# EAGLE board core-controller (EAGLE 6.6.0)
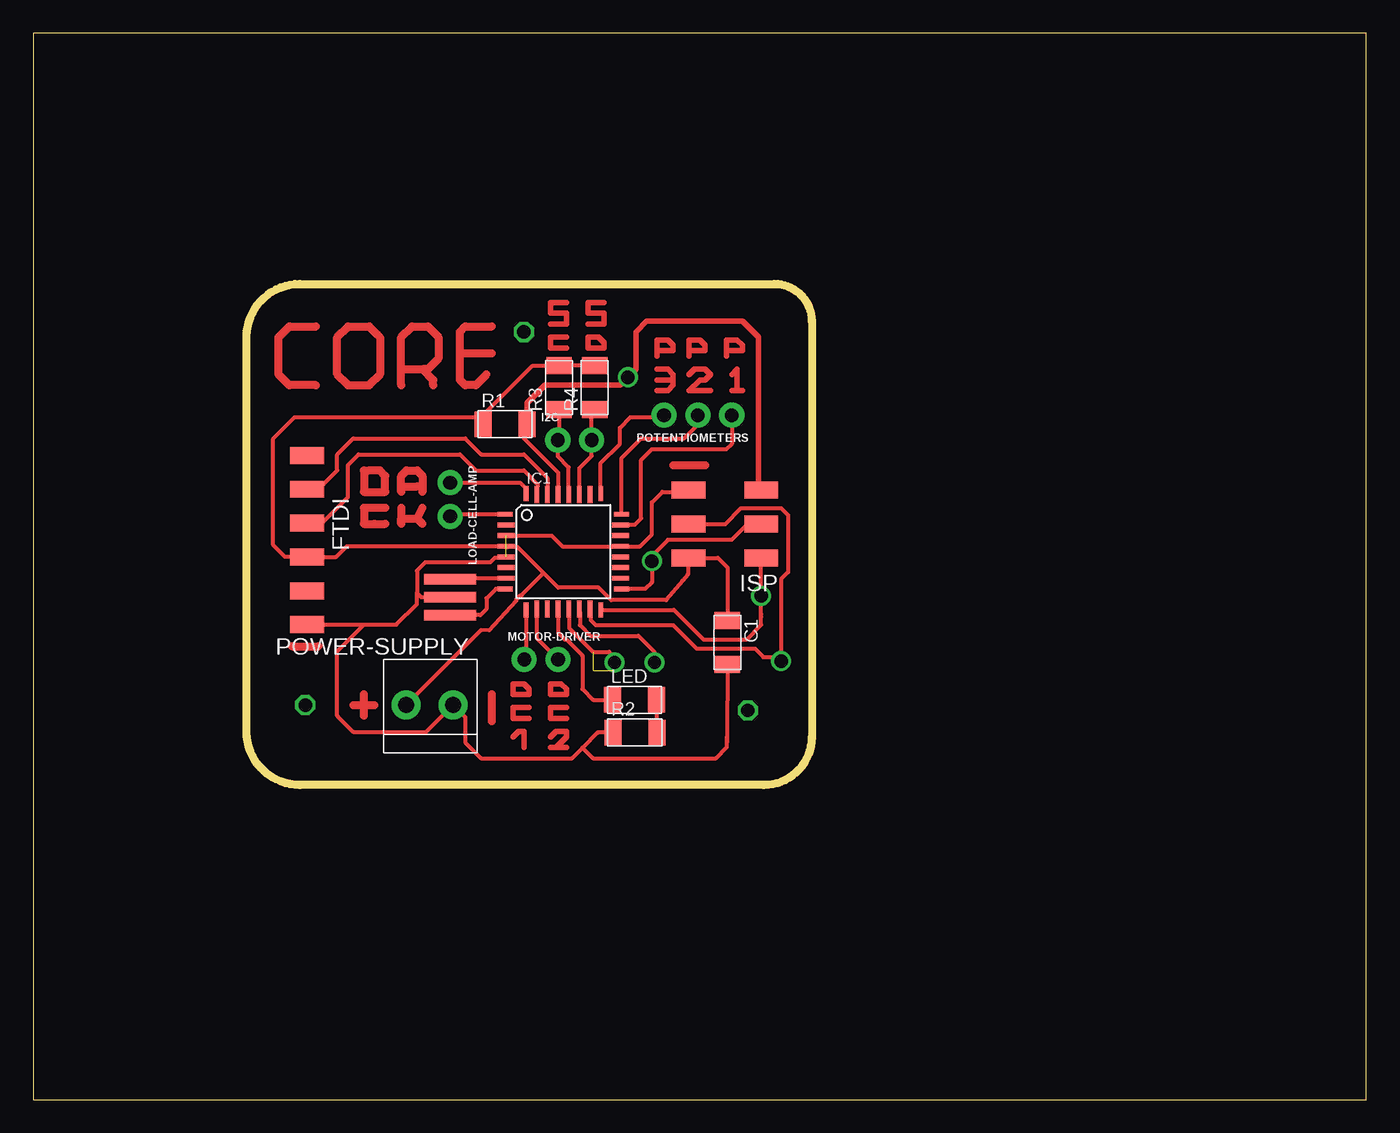
[diagram p0: board, top side]

Size 100 x 80 mm. Coordinates in mm from the lower left corner, seen from the top.
Outline: 0,0 100,0 100,80 0,80 0,0
Copper layers (1*16): Top 0.035mm / dielectric 1.5mm / Bottom 0.035mm
Design rules "default *": minimum track width 6mil, minimum drill 0.35mm, track to track 15.625mil, track to pad 15.625mil, pad to pad 15.625mil, via to via 15.625mil, smd to smd 15.625mil, copper to edge 40mil, drill to drill 6mil, minimum pad ring 10mil, minimum via ring 8mil, stop-mask expansion 4mil, vias tented up to drill 0mil, thermal gap 10mil
Milling: area 16,23.6 to 58.4,61.2

## Footprints (pad centres in the part's own frame; a part is rotated, then mirrored left to right if it is on the bottom)
C1206FAB = smd 1.27 x 1.905: 1 -1.651,0; 2 1.651,0
1X06SMD = smd 2.54 x 1.27: 1 0,6.35; 2 0,3.81; 3 0,1.27; 4 0,-1.27; 5 0,-3.81; 6 0,-6.35
1X02_NO_SILK = drill 1.016 pad 1.88: 1 0,0; 2 2.54,0
TQFP32-08THIN = smd 1.118 x 0.356: 1 -4.369,2.8; 8 -4.369,-2.8; 17 4.369,-2.8; 24 4.369,2.8 | smd 1.27 x 0.356: 2 -4.293,2; 3 -4.293,1.2; 4 -4.293,0.4; 5 -4.293,-0.4; 6 -4.293,-1.2; 7 -4.293,-2; 18 4.293,-2; 19 4.293,-1.2; 20 4.293,-0.4; 21 4.293,0.4; 22 4.293,1.2; 23 4.293,2 | smd 0.356 x 1.118: 9 -2.8,-4.369; 16 2.8,-4.369; 25 2.8,4.369; 32 -2.8,4.369 | smd 0.356 x 1.27: 10 -2,-4.293; 14 1.2,-4.293; 15 2,-4.293; 26 2,4.293; 27 1.2,4.293; 31 -2,4.293 | smd 0.35 x 1.27: 11 -1.2,-4.293; 12 -0.4,-4.293; 13 0.4,-4.293; 28 0.4,4.293; 29 -0.4,4.293; 30 -1.2,4.293
2X03SMD = smd 2.54 x 1.27: 1 -2.54,2.54; 2 2.92,2.54; 3 -2.54,0; 4 2.92,0; 5 -2.54,-2.54; 6 2.92,-2.54
LED1206FAB = smd 1.27 x 1.905: 1 -1.651,0; 2 1.651,0
1X03_NO_SILK = drill 1.016 pad 1.88: 1 0,0; 2 2.54,0; 3 5.08,0
ED555DS-2DS = drill 1.2 pad 2.184: 1 1.8,0; 2 -1.7,0
R1206FAB = smd 1.27 x 1.905: 1 -1.651,0; 2 1.651,0
EFOBM = smd 0.8 x 3.9: 1 -1.35,0; 2 0,0; 3 1.35,0

## Placement (x,y rotation side)
C1  1uf  [C1206FAB]  52.07,34.29 270 top
FTDI  FTDI  [1X06SMD]  20.53,41.98 180 top
I2C  [1X02_NO_SILK]  39.35,49.48 0 top
IC1  ATMEGA88-THIN  [TQFP32-08THIN]  39.77,41.11 0 top
ISP  [2X03SMD]  52.07,43.18 180 top
LED  Blue  [LED1206FAB]  45.11,29.99 0 top
LOAD-CELL-AMP  [1X02_NO_SILK]  31.27,46.29 270 top
MOTOR-DRIVER  [1X02_NO_SILK]  36.83,33.02 0 top
POTENTIOMETERS  [1X03_NO_SILK]  52.4,51.34 180 top
POWER-SUPPLY  TERM-1X02-FABLAB  [ED555DS-2DS]  29.68,29.61 0 top
R1  10kohm  [R1206FAB]  35.39,50.67 0 top
R2  499ohm  [R1206FAB]  45.13,27.54 0 top
R3  10kohm  [R1206FAB]  39.44,53.41 90 top
R4  10kohm  [R1206FAB]  42.12,53.41 90 top
XTAL  20 Mhz  [EFOBM]  31.28,37.7 270 top

## Library data of the parts
C1 FTDI IC1 ISP LED POWER-SUPPLY R1-R4 XTAL = fab
I2C LOAD-CELL-AMP MOTOR-DRIVER POTENTIOMETERS = SparkFun-Connectors

## Nets
5V: C1.1 FTDI.3 IC1.4 ISP.2 POWER-SUPPLY.2 R1.1 R3.2 R4.2
AVCC: IC1.18
CLK: IC1.1 LOAD-CELL-AMP.2
DAT: IC1.32 LOAD-CELL-AMP.1
DC-IN-1: IC1.9 MOTOR-DRIVER.1
DC-IN-2: IC1.10 MOTOR-DRIVER.2
GND: C1.2 FTDI.1 IC1.3 IC1.5 IC1.21 ISP.6 POWER-SUPPLY.1 R2.1 XTAL.2
LED: IC1.12 LED.1
MISO: IC1.16 ISP.1
MOSI: IC1.15 ISP.4
N$1: IC1.7 XTAL.1
N$2: IC1.8 XTAL.3
N$5: LED.2 R2.2
PTM-1: IC1.23 POTENTIOMETERS.1
PTM-2: IC1.24 POTENTIOMETERS.2
PTM-3: IC1.25 POTENTIOMETERS.3
RST: IC1.29 ISP.5 R1.2
RXD: FTDI.5 IC1.30
SCK: IC1.17 ISP.3
SCL: I2C.1 IC1.28 R3.1
SDA: I2C.2 IC1.27 R4.1
TXD: FTDI.4 IC1.31
VCC: IC1.6

## Tracks (layer width: path | path; a pad name or v marks a point on that pad's centre or on a via)
5V
  Top 0.305: C1.1 52.07,39.93 51.36,40.64 ISP.2 49.1,39.4 48.7,38.91 47.48,37.48 43.35,37.48 42.42,38.41 39.38,38.41 38.29,39.49 | R4.2 R3.2 37.46,55.06 33.74,51.34 33.74,51.2 | R1.1 33.74,51.2 | 33.74,51.2 19.6,51.2 18,49.6 18,41.6 18.89,40.71 FTDI.3 22.71,40.71 23.51,41.51 IC1.4 35.55,41.44 36.34,41.44 38.29,39.49 | POWER-SUPPLY.2 33.6,35.23 34.2,35.2 36.24,37.44 36.24,37.53 36.56,37.85 36.65,37.85 38.29,39.49
CLK
  Top 0.305: IC1.1 31.43,43.91 LOAD-CELL-AMP.2
DAT
  Top 0.305: LOAD-CELL-AMP.1 36.51,46.29 36.97,45.83 IC1.32
DC-IN-1
  Top 0.305: IC1.9 36.97,33.16 MOTOR-DRIVER.1
DC-IN-2
  Top 0.305: IC1.10 37.77,34.62 MOTOR-DRIVER.2
GND  (1 unrouted)
  Top 0.305: ISP.6 49.48,45.72 49.6,45.6 47.2,45.6 46.4,44.8 46.4,42.4 45.51,41.51 IC1.21 39.69,41.51 38.89,42.31 IC1.3 | C1.2 52.04,27.2 | 52.04,27.2 52.04,26.81 | IC1.5 35.41,40.64 34.61,40.64 34.28,40.3 29.4,40.3 28.78,39.68 28.78,38.02 | XTAL.2 29.1,37.7 28.78,38.02 | 28.78,38.02 28.78,37.18 27.23,35.63 24.8,35.63 | FTDI.1 24.8,35.63 | 24.8,35.63 22.8,33.63 22.8,28.8 24,27.6 29.47,27.6 POWER-SUPPLY.1 32.4,28.69 32.4,26.8 33.6,25.6 40.4,25.6 41.2,26.4 | 41.2,26.4 42,25.6 51.2,25.6 52.04,26.44 52.04,27.2 | R2.1 42.34,27.54 41.2,26.4
LED
  Top 0.305: IC1.12 39.37,35.03 39.89,34.51 39.99,34.51 41.2,33.3 41.2,30.8 42.01,29.99 LED.1
MISO
  Top 0.305: IC1.16 48.06,36.74 50.27,34.53 53.53,34.53 54.61,35.61 54.61,36.21 54.61,36.4 ISP.1
MOSI  (via drill 1 pad 1.3)
  Top 0.305: ISP.4 51.92,43.18 53.11,44.37 56.11,44.37 56.63,43.84 56.63,39.58 56.1,39.04 56.1,33.2 | 56.1,33.2 v56.1,32.9 | IC1.15 41.84,36.75 41.84,35.95 42.19,35.6 48,35.6 49.77,33.83 54.15,33.83 54.78,33.2 56.1,33.2
N$1
  Top 0.305: IC1.7 30.54,39.11 XTAL.1
N$2
  Top 0.305: IC1.8 34.71,38.31 34,37.6 34,36.8 33.55,36.35 XTAL.3
N$3
  Top 0.61: 19.4,34 21.4,34
N$4
  Top 0.61: 24,29.6 25.6,29.6
N$5
  Top 0.305: LED.2 46.76,27.56 R2.2
N$6
  Top 0.61: 24.8,28.8 24.8,30.4
N$7
  Top 0.61: 34.4,28.4 34.4,30.4
N$8
  Top 0.61: 24.8,47.2 24.8,45.6 26.4,45.6 26.4,46.8 26,47.2 25.6,47.2 25.2,47.2 24.8,47.2
N$9
  Top 0.61: 27.6,45.6 27.6,46 | 27.6,46 27.6,46.8 28,47.2 28.8,47.2 29.2,46.8 29.2,45.6 | 27.6,46 28.8,46
N$10
  Top 0.406: 36,31.2 36,30.4 37.2,30.4 37.2,30.8 36.8,31.2 36,31.2
N$11
  Top 0.61: 26.4,43.2 25.6,43.2 24.8,43.2 24.8,44.4 26.4,44.4
N$12
  Top 0.61: 27.6,44.4 27.6,43.6 | 27.6,43.2 27.6,43.6 | 27.6,43.6 28.8,43.6 | 29.2,43.2 28.8,43.6 | 28.8,43.6 29.2,44.4
N$13
  Top 0.406: 37.2,29.41 36,29.41 36,28.61 37.2,28.61
N$14
  Top 0.406: 38.8,31.2 39.6,31.2 40,30.8 40,30.4 38.8,30.4 38.8,31.2
N$15
  Top 0.406: 40,29.41 38.8,29.41 38.8,28.61 40,28.61
N$16
  Top 0.406: 36,27.22 36.4,27.62 36.8,27.62 36.8,26.42
N$17
  Top 0.406: 38.8,27.22 39.2,27.62 40,27.62 40,27.22 39.2,26.42 | 39.2,26.42 38.8,26.42 | 39.2,26.42 40,26.42
N$18
  Top 0.61: 48,47.6 50.4,47.6
N$19
  Top 0.406: 46.8,53.2 47.6,53.2 48,53.6 48,54 | 46.8,54 48,54 | 48,54 48,54.4 47.6,54.8 46.8,54.8
N$20
  Top 0.406: 46.8,56.19 46.8,56.99 47.6,56.99 48,56.59 48,56.19 46.8,56.19 | 46.8,56.19 46.8,55.79
N$21
  Top 0.406: 38.8,58.19 40,58.19 40,58.99 38.8,58.99 38.8,59.79 40,59.79
N$22
  Top 0.406: 50.8,53.2 49.2,53.2 50,54 50.4,54 50.8,54.4 50.4,54.8 49.6,54.8 49.2,54.4
N$23
  Top 0.406: 52.4,53.2 52.8,53.2 | 53.2,53.2 52.8,53.2 | 52.8,53.2 52.8,54.8 52.4,54.4
N$24
  Top 0.406: 49.2,56.19 49.2,56.99 50,56.99 50.4,56.59 50.4,56.19 49.2,56.19 | 49.2,56.19 49.2,55.79
N$25
  Top 0.406: 52,56.19 52,56.99 52.8,56.99 53.2,56.59 53.2,56.19 52,56.19 | 52,56.19 52,55.79
N$26
  Top 0.406: 40,56.4 38.8,56.4 38.8,57.2 40,57.2
N$27
  Top 0.406: 41.6,56.4 41.6,57.2 42.4,57.2 42.8,56.8 42.8,56.4 41.6,56.4
N$28
  Top 0.406: 41.6,58.19 42.8,58.19 42.8,58.99 41.6,58.99 41.6,59.79 42.8,59.79
N$29
  Top 0.61: 21.2,53.6 19.2,53.6 18.4,54.4 18.4,57.2 19.2,58 21.2,58
N$30
  Top 0.61: 23.6,53.6 22.8,54.4 22.8,57.2 23.6,58 25.2,58 25.8,57.4 26,57.2 26,54.4 25.2,53.6 23.6,53.6
N$31
  Top 0.61: 27.6,53.6 27.6,57.2 28.4,58 29.6,58 30.4,57.2 30.4,55.6 29.6,54.8 29.2,54.8 | 28,54.8 29.2,54.8 | 30,53.6 30,54 29.2,54.8
N$32
  Top 0.61: 34.4,58 32.4,58 32,57.6 32,54 32.4,53.6 33.2,53.6 34,54.4
N$33
  Top 0.61: 32.4,56 34.4,56
N$34  (via drill 1)
  other vias: 20.4,29.6
N$35  (via drill 1)
  other vias: 53.6,29.2
N$36  (via drill 1)
  other vias: 36.8,57.6
N$37  (via drill 1 pad 1.3)  (2 unrouted)
  Top 0.305: 40.2,36.6 40.2,35.4 42,33.6 43.2,33.6 43.6,33.2 v43.6,32.8 43.6,32.6
N$38  (via drill 1 pad 1.3)
  Top 0.305: 41,36.6 41,35.6 41.8,34.8 45.4,34.8 46.6,33.6 v46.6,32.8 46.6,32.6
N$39  (via drill 1 pad 1.3)
  other vias: 54.6,37.8
PTM-1
  Top 0.305: POTENTIOMETERS.1 52.4,49.2 52,48.8 46.4,48.8 45.6,48 45.6,43.6 45.11,43.11 IC1.23
PTM-2
  Top 0.305: POTENTIOMETERS.2 49.86,50.66 48.8,49.6 45.6,49.6 44.14,48.14 IC1.24
PTM-3
  Top 0.305: POTENTIOMETERS.3 47.18,51.2 44.8,51.2 44,50.4 44,49.2 42.57,47.77 IC1.25
RST  (via drill 1 pad 1.3)
  Top 0.305: 36.8,51.6 36.8,50.8 | 36.8,50.8 36.8,49.6 39.37,47.03 IC1.29 | R1.2 36.91,50.8 36.8,50.8
  Top 0.406: R1.2 37.04,52.24 38.4,53.6 44,53.6 v44.6,54.2 45.2,54.8 45.2,57.6 46,58.4 53.2,58.4 54.4,57.2 54.4,45.93 ISP.5
RXD
  Top 0.305: FTDI.5 21.39,45.79 22.8,47.2 22.8,48.4 24,49.6 32.4,49.6 33.6,48.4 36.8,48.4 38.57,46.63 IC1.30
SCK  (via drill 1 pad 1.3)
  Top 0.305: ISP.3 53.58,43.18 52.39,41.99 47.65,41.99 47.64,42 47.6,42 46.4,40.8 v46.4,40.4 46.4,38.8 45.91,38.31 IC1.17
SCL
  Top 0.305: IC1.28 40.17,47.43 39.35,48.25 39.35,49.2 | 39.35,49.2 I2C.1 | R3.1 39.44,49.29 39.35,49.2
SDA
  Top 0.305: IC1.27 40.97,47.37 41.89,48.29 I2C.2 41.89,51.53 R4.1
TXD
  Top 0.305: FTDI.4 21.65,43.25 23.6,45.2 23.6,47.6 24.4,48.4 32,48.4 33.2,47.2 36.8,47.2 37.84,46.16 37.84,46 37.77,45.93 IC1.31